# EAGLE board IOT-NodeMCU8266-1_v5 (EAGLE 9.7.0)
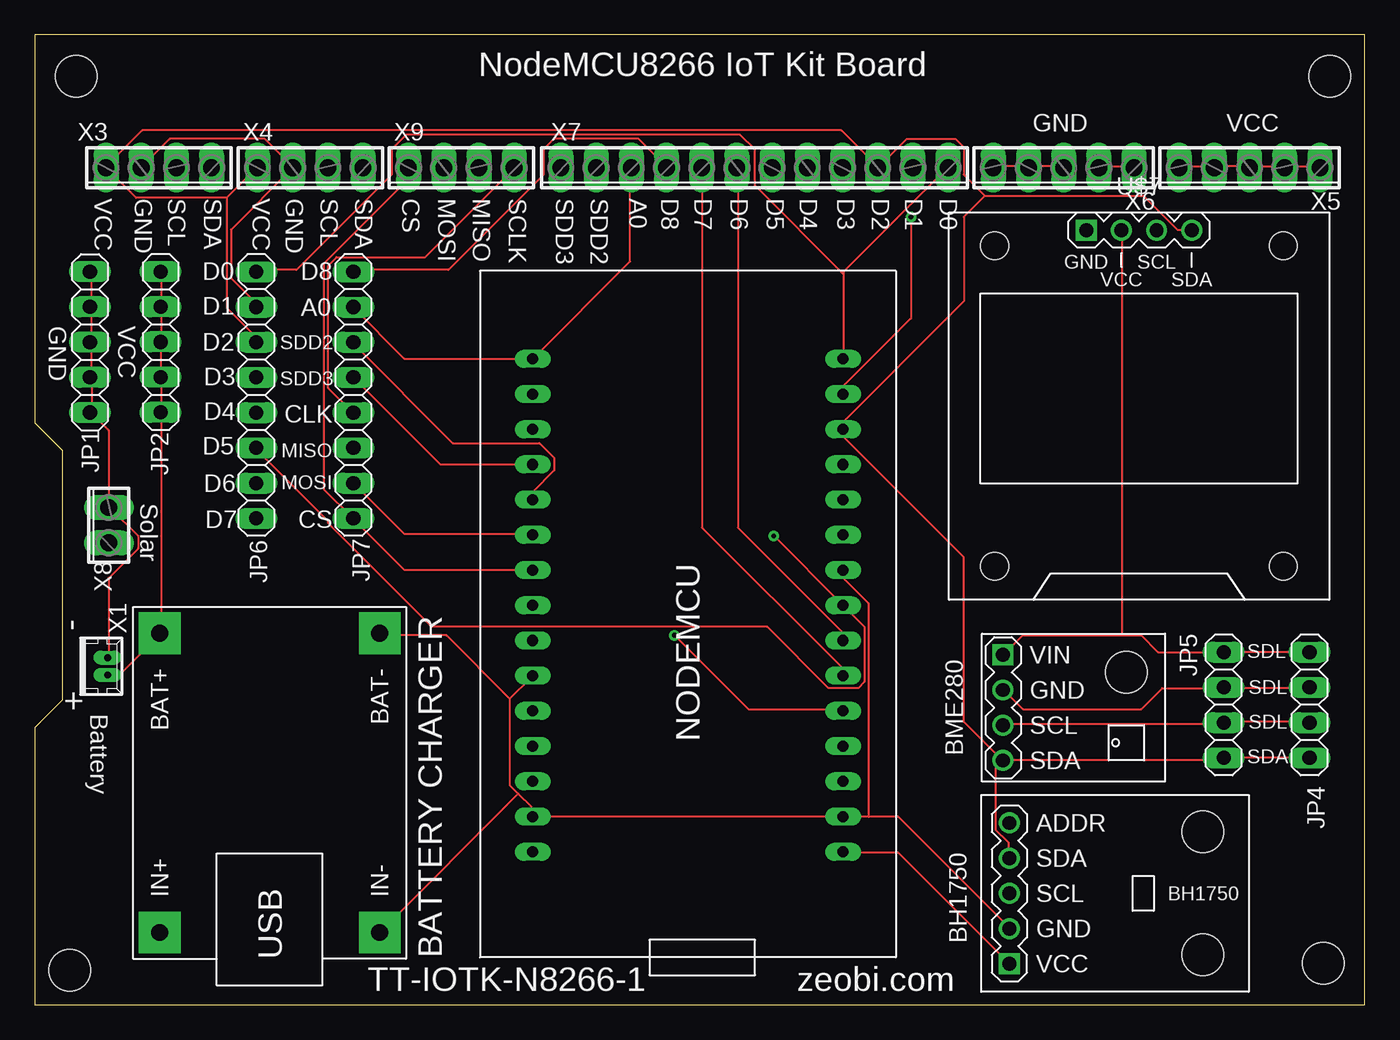
[diagram p0: board, top side]
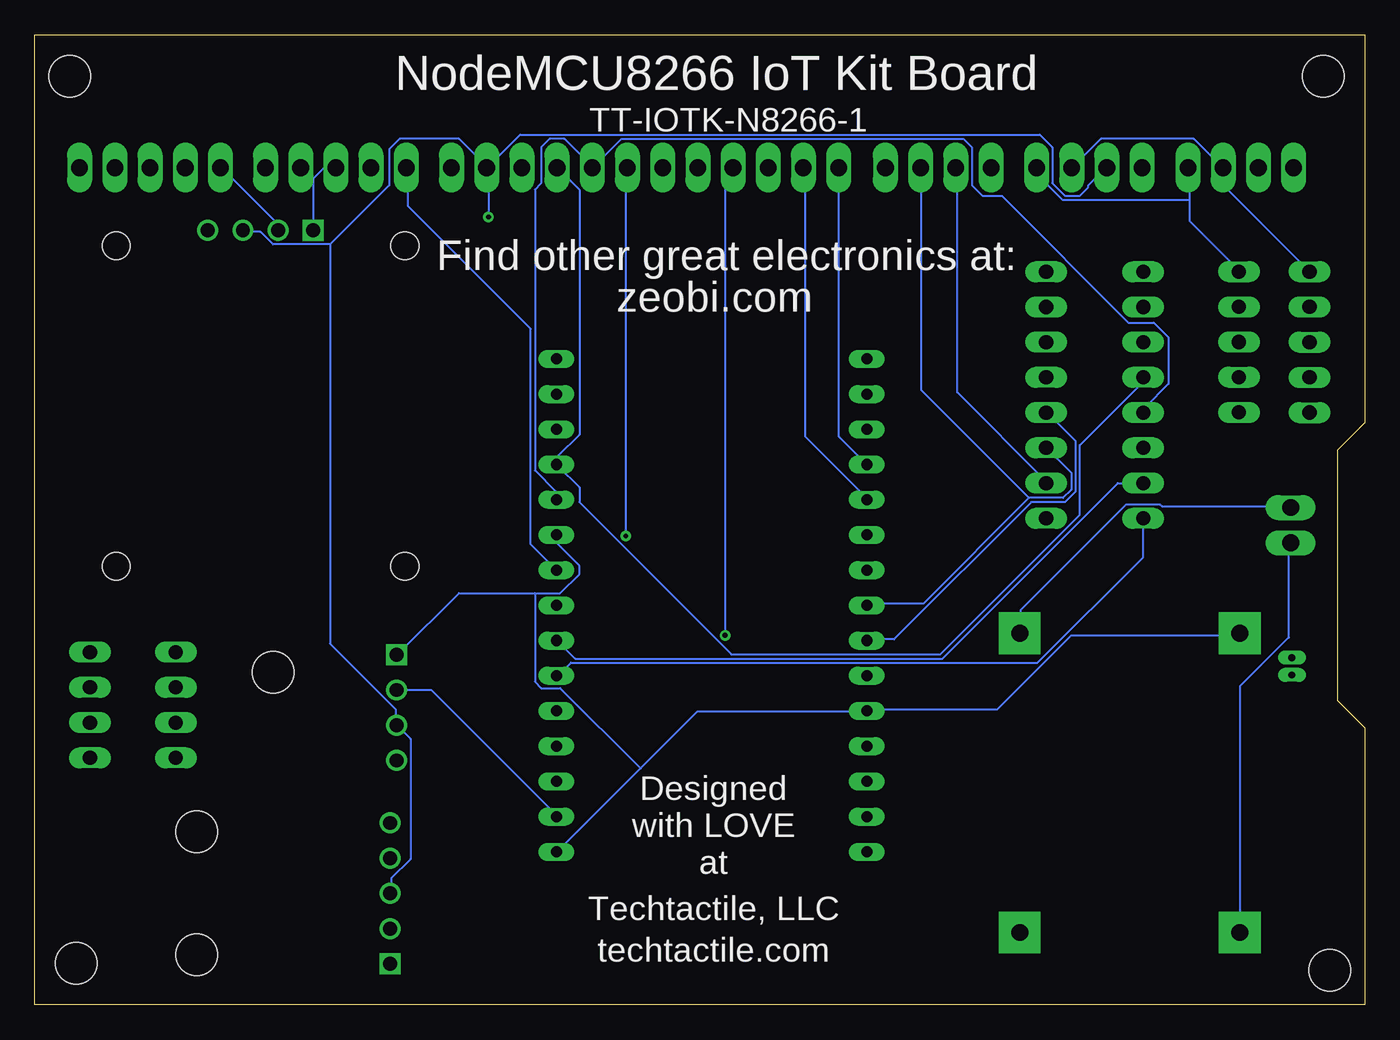
[diagram p1: board, bottom side, seen from below]

Size 96 x 70 mm. Coordinates in mm from the lower left corner, seen from the top.
Outline: 0,0 96,0 96,70 0,70 0,42 2,40 2,22 0,20 0,0
Copper layers (1*16): Top 0.035mm / dielectric 1.5mm / Bottom 0.035mm
Design rules "default": minimum track width 6mil, minimum drill 0.35mm, track to track 6mil, track to pad 6mil, pad to pad 6mil, via to via 6mil, smd to smd 6mil, copper to edge 40mil, drill to drill 6mil, minimum pad ring 10mil, minimum via ring 8mil, stop-mask expansion 4mil, vias tented up to drill 0mil, thermal gap 10mil
Holes 3 mm at 3,67 93.48,67 93,3 2.52,2.52

## Footprints (pad centres in the part's own frame; a part is rotated, then mirrored left to right if it is on the bottom)
TEMP-HUM-PRES-BME280 = drill 1 square: 1 -5.08,3.81 | drill 1: 2 -5.08,1.27; 3 -5.08,-1.27; 4 -5.08,-3.81 | hole 3: 3.81,2.54
1X05 = drill 1.016 long: 1 -5.08,0; 2 -2.54,0; 3 0,0; 4 2.54,0; 5 5.08,0
1X04 = drill 1.016 long: 1 -3.81,0; 2 -1.27,0; 3 1.27,0; 4 3.81,0
1X08 = drill 1.016 long: 1 -8.89,0; 2 -6.35,0; 3 -3.81,0; 4 -1.27,0; 5 1.27,0; 6 3.81,0; 7 6.35,0; 8 8.89,0
NODEMCUESP8266 = drill 0.8 long: 1 12.24,15.24; 2 12.24,12.7; 3 12.24,10.16; 4 12.24,7.62; 5 12.24,5.08; 6 12.24,2.54; 7 12.24,0; 8 12.24,-2.54; 9 12.24,-5.08; 10 12.24,-7.62; 11 12.24,-10.16; 12 12.24,-12.7; 13 12.24,-15.24; 14 12.24,-17.78; 15 12.24,-20.32; 16 -10.16,-20.32; 17 -10.16,-17.78; 18 -10.16,-15.24; 19 -10.16,-12.7; 20 -10.16,-10.16; 21 -10.16,-7.62; 22 -10.16,-5.08; 23 -10.16,-2.54; 24 -10.16,0; 25 -10.16,2.54; 26 -10.16,5.08; 27 -10.16,7.62; 28 -10.16,10.16; 29 -10.16,12.7; 30 -10.16,15.24
LIGHT-SENSOR-BH1750 = drill 1 square: 1 -7.62,-5.08 | drill 1: 2 -7.62,-2.54; 3 -7.62,0; 4 -7.62,2.54; 5 -7.62,5.08 | hole 3: 6.35,4.445; 6.35,-4.445
BATTERY-CHARGER-LI-5V = drill 1.2 pad 3 square: BAT+ 10.795,8.255; BAT- 10.795,-7.62; IN+ -10.795,8.255; IN- -10.795,-7.62
DISPLAY-OLED-128X64-I2C = drill 1 square: 1 -3.81,12.7 | drill 1: 2 -1.27,12.7; 3 1.27,12.7; 4 3.81,12.7 | hole 2: -10.414,11.557; 10.414,11.557; 10.414,-11.557; -10.414,-11.557
53047-02 = drill 0.5 pad 0.698 long: 1 0.625,0.45; 2 -0.625,0.45
4POL254 = drill 1.2 long: 1 -3.81,0; 2 -1.27,0; 3 1.27,0; 4 3.81,0
5POL254 = drill 1.2 long: 1 -5.08,0; 2 -2.54,0; 3 0,0; 4 2.54,0; 5 5.08,0
12POL254 = drill 1.2 long: 1 -13.97,0; 2 -11.43,0; 3 -8.89,0; 4 -6.35,0; 5 -3.81,0; 6 -1.27,0; 7 1.27,0; 8 3.81,0; 9 6.35,0; 10 8.89,0; 11 11.43,0; 12 13.97,0
2POL254 = drill 1.2 long: 1 -1.27,0; 2 1.27,0

## Placement (x,y rotation side)
BME280  TEMP-HUM-PRES-BME280  [TEMP-HUM-PRES-BME280]  74.97,21.45 0 top
JP1  GND  [1X05]  3.99,47.82 90 top
JP2  VCC  [1X05]  9.09,47.83 90 top
JP4  I2C  [1X04]  92.01,21.64 270 top
JP5  I2C  [1X04]  85.81,21.64 270 top
JP6  PINHD-1X8  [1X08]  16,44 270 top
JP7  PINHD-1X8  [1X08]  23,44 270 top
U$1  [NODEMCUESP8266]  48.18,26.29 180 top
U$4  LIGHT-SENSOR-BH1750  [LIGHT-SENSOR-BH1750]  77.97,8.05 0 top
U$5  BATTERY-CHARGER-LI-5V  [BATTERY-CHARGER-LI-5V]  17.28,16.02 90 top
U$7  DISPLAY-OLED-128X64-I2C  [DISPLAY-OLED-128X64-I2C]  79.7,43.2 0 top
X1  Battery  [53047-02]  4.81,24.43 270 top
X3  [4POL254]  8.96,60.4 180 top
X4  [4POL254]  19.89,60.4 180 top
X5  [5POL254]  87.67,60.4 180 top
X6  [5POL254]  74.26,60.4 180 top
X7  [12POL254]  51.95,60.4 180 top
X8  [2POL254]  5.35,34.61 90 top
X9  [4POL254]  30.79,60.4 180 top

## Library data of the parts
BME280 U$4 U$5 = diy-modules (2)
JP1 JP2 JP4-JP7 = Connector; CATEGORY: CONNECTOR; SUB-CATEGORY: PIN-HEADER
U$1 = NODEMCU
U$7 = diy-modules
X1 = con-molex; MF: MOLEX; MPN: 53047-0210; OC_FARNELL: 9733051; OC_NEWARK: 57H4701
X3-X9 = con-phoenix-254; OC_FARNELL: unknown; OC_NEWARK: unknown

## Nets
A0: JP7.2 U$1.15 X7.10
CS: JP7.8 U$1.9 X9.4
D0: JP6.1 U$1.16 X7.1
D3: JP6.4 U$1.19 X7.4
D4: JP6.5 U$1.20 X7.5
D5: JP6.6 U$1.23 X7.6
D6: JP6.7 U$1.24 X7.7
D7: JP6.8 U$1.25 X7.8
D8: JP7.1 U$1.26 X7.9
GND: BME280.2 JP1.1 JP1.2 JP1.3 JP1.4 JP1.5 JP4.2 JP5.2 U$1.2 U$1.6 U$1.22 U$1.29 U$4.2 U$5.BAT- U$5.IN- U$7.1 X1.2 X3.2 X4.2 X6.1 X6.2 X6.3 X6.4 X6.5 X8.2
MISO: JP7.6 U$1.8 X9.2
MOSI: JP7.7 U$1.10 X9.3
N$10: U$4.5
RX: U$1.27
SCL: BME280.3 JP4.3 JP5.3 JP6.2 U$1.17 U$4.3 U$7.3 X3.3 X4.3 X7.2
SCLK: JP7.5 U$1.7 X9.1
SDA: BME280.4 JP4.4 JP5.4 JP6.3 U$1.18 U$4.4 U$7.4 X3.4 X4.4 X7.3
SDD2: JP7.3 U$1.11 X7.11
SDD3: JP7.4 U$1.12 X7.12
SOLARIN: U$5.IN+ X8.1
TX: U$1.28
VCC: BME280.1 JP2.1 JP2.2 JP2.3 JP2.4 JP2.5 JP4.1 JP5.1 U$1.5 U$1.21 U$1.30 U$4.1 U$5.BAT+ U$7.2 X1.1 X3.1 X4.1 X5.1 X5.2 X5.3 X5.4 X5.5

## Tracks (layer width: path | path; a pad name or v marks a point on that pad's centre or on a via)
A0
  Top 0.152: JP7.2 23.01,50.29 26.67,46.63 35.81,46.63 U$1.15 35.97,46.63 42.98,53.65 42.98,60.35 X7.10
CS
  Top 0.152: U$1.9 35.81,31.39 26.67,31.39 23.01,35.05 JP7.8 22.86,35.2 20.88,37.19 20.88,53.49 26.98,59.59 26.98,60.35 X9.4
D0
  Top 0.152: 58.37,52.73 58.37,52.88 65.84,60.35 X7.1 | 58.37,52.73 58.37,46.63 U$1.16 | 58.37,52.73 51.97,59.13 51.97,61.72 50.9,62.79 26.82,62.79 25.76,61.72 25.76,59.89 18.9,53.03 16,53.03 JP6.1
D3
  Bottom 0.152: X7.4 58.22,60.35 56.69,58.83 56.69,41.15 58.22,39.62 58.22,39.01 U$1.19 58.22,38.86 56.69,37.34 56.69,36.27 45.72,25.3 30.63,25.3 20.57,35.36 20.57,40.39 16,44.96 JP6.4
D4
  Bottom 0.152: U$1.20 58.37,36.58 58.37,37.03 59.89,38.56 59.89,58.83 59.44,59.28 59.44,61.87 58.83,62.48 57.76,62.48 55.78,60.5 X7.5 55.63,60.5 53.65,62.48 28.96,62.48 28.35,61.87 28.35,59.13 27.58,58.37 26.21,58.37 17.07,49.23 15.24,49.23 14.17,48.16 14.17,44.81 15.85,43.13 15.85,42.82 JP6.5
D5  (via drill 0.35)
  Top 0.152: v53.34,33.83 58.22,28.96 U$1.23 58.37,28.8 59.89,27.28 59.89,23.32 59.44,22.86 57.3,22.86 52.88,27.28 28.65,27.28 21.18,34.75 21.18,34.9 16,40.08 JP6.6
  Bottom 0.152: v53.34,33.83 53.34,60.35 X7.6
D6
  Top 0.152: U$1.24 58.22,26.36 58.22,26.98 50.75,34.44 50.75,60.35 X7.7
  Bottom 0.152: JP6.7 17.83,37.64 30.48,24.99 57,24.99 58.22,26.21 U$1.24
D7
  Top 0.152: U$1.25 58.22,23.77 58.22,24.38 48.16,34.44 48.16,60.35 X7.8
  Bottom 0.152: JP6.8 16,35.05 16,32.31 23.62,24.69 57.3,24.69 58.22,23.77 U$1.25
D8  (via drill 0.35)
  Top 0.152: v46.18,26.67 51.51,21.34 58.22,21.34 U$1.26 | JP7.1 23.01,53.03 29.87,53.03 36.73,59.89 36.73,61.72 37.49,62.48 43.59,62.48 45.57,60.5 X7.9
  Bottom 0.152: v46.18,26.67 46.18,59.89 45.72,60.35 X7.9
GND
  Top 0.152: X1.2 5.33,25.15 5.33,30.79 7.47,32.92 7.47,33.83 5.49,35.81 X8.2 5.33,35.97 5.33,41.45 4.12,42.67 JP1.1 4.12,42.82 4.12,45.26 JP1.2 4.12,45.41 4.12,47.7 JP1.3 4.12,47.85 4.12,50.29 JP1.4 4.12,50.44 4.12,52.88 JP1.5 | 34.9,15.24 34.29,15.85 34.29,22.1 | 34.9,15.24 35.81,14.33 35.81,13.72 U$1.2 35.97,13.56 58.22,13.56 U$1.29 58.37,13.56 60.2,13.56 | 34.29,22.1 35.81,23.62 U$1.6 | 34.9,15.24 24.99,5.33 U$5.IN- | 34.29,22.1 29.72,26.67 24.99,26.67 U$5.BAT- | X6.5 69.19,60.5 71.63,60.5 X6.4 71.78,60.5 74.22,60.5 X6.3 | X6.1 79.25,60.5 76.81,60.5 X6.2 | JP4.2 91.9,22.86 85.95,22.86 JP5.2 85.8,22.86 81.38,22.86 79.86,21.34 71.32,21.34 69.95,22.71 BME280.2 | 60.2,13.56 62.33,13.56 70.26,5.64 U$4.2 | 60.2,13.56 60.2,28.96 58.37,30.79 58.37,31.24 U$1.22
  Bottom 0.152: JP1.5 4.12,53.03 10.21,59.13 10.21,60.35 X3.2 10.36,60.5 12.34,62.48 19.05,62.48 21.03,60.5 X4.2 | 75.89,59.59 75.89,55.93 U$7.1 | 75.89,59.59 76.66,60.35 X6.2 | 75.89,59.59 75.13,60.35 74.37,60.35 X6.3 | BME280.2 69.8,22.71 67.36,22.71 58.37,13.72 U$1.29 | X6.5 69.04,60.35 69.04,57.61 60.2,48.77 60.2,33.22 58.37,31.39 U$1.22 | X8.2 5.49,35.97 14.63,35.97 14.78,36.12 17.22,36.12 24.84,28.5 24.84,26.82 U$5.BAT-
MISO
  Bottom 0.152: 24.23,36.58 31.85,28.96 35.81,28.96 U$1.8 | 24.23,36.58 21.79,36.58 21.18,37.19 21.18,38.41 22.86,40.08 JP7.6 | 24.23,36.58 32,44.35 32,60.35 X9.2
MOSI
  Top 0.152: U$1.10 35.81,33.98 26.67,33.98 23.01,37.64 JP7.7
  Bottom 0.152: X9.3 29.41,60.35 29.41,44.2 23.01,37.8 JP7.7
SCL  (via drill 0.35)
  Top 0.152: JP4.3 91.9,20.42 85.95,20.42 JP5.3 85.8,20.27 69.95,20.27 BME280.3 | JP6.2 15.85,50.44 15.85,50.75 14.17,52.43 14.17,55.93 18.59,60.35 X4.3 18.59,60.5 16.61,62.48 9.75,62.48 7.77,60.5 X3.3 | v63.25,56.84 63.25,49.53 58.37,44.65 58.37,44.2 U$1.17
  Bottom 0.152: U$4.3 70.26,8.08 70.26,9.14 68.89,10.52 68.89,19.2 69.8,20.12 BME280.3 69.95,20.27 69.95,21.34 74.68,26.06 74.68,54.86 | v63.25,56.84 63.25,60.35 X7.2 | 74.68,54.86 78.79,54.86 79.7,55.78 80.92,55.78 U$7.3 | 74.68,54.86 70.41,59.13 70.41,61.72 69.65,62.48 65.38,62.48 63.4,60.5 X7.2 | X4.3 18.75,60.35 19.96,59.13 19.96,58.98 20.57,58.37 21.64,58.37 22.55,59.28 22.55,61.87 23.47,62.79 60.96,62.79 63.25,60.5 X7.2
SCLK
  Top 0.152: X9.1 34.59,60.35 28.19,53.95 21.79,53.95 21.18,53.34 21.18,44.5 22.86,42.82 JP7.5
  Bottom 0.152: U$1.7 35.81,26.36 33.98,26.36 24.08,36.27 21.64,36.27 20.88,37.03 20.88,40.69 22.86,42.67 JP7.5
SDA
  Top 0.152: JP4.4 91.9,17.83 85.95,17.83 JP5.4 85.8,17.68 69.95,17.68 BME280.4 | BME280.4 69.8,17.68 67.06,20.42 67.06,32.31 58.37,41 58.37,41.45 U$1.18 58.37,41.6 58.37,42.06 67.06,50.75 67.06,56.84 68.58,58.37 | U$4.4 70.26,10.67 70.26,11.73 69.34,12.65 69.34,17.07 69.8,17.53 BME280.4 | 13.87,58.22 13.87,50.29 15.85,48.31 15.85,47.85 JP6.3 | 13.87,58.22 16,60.35 X4.4 | 13.87,58.22 7.32,58.22 5.18,60.35 X3.4 5.18,60.5 7.77,63.09 58.22,63.09 60.81,60.5 X7.3 60.96,60.5 62.94,62.48 66.45,62.48 67.06,61.87 67.06,59.89 68.58,58.37 | 68.58,58.37 80.01,58.37 82.45,55.93 83.36,55.93 U$7.4
SDD2
  Top 0.152: U$1.11 35.97,36.58 35.97,37.03 37.49,38.56 37.49,39.47 36.42,40.54 30.18,40.54 23.01,47.7 JP7.3
  Bottom 0.152: X7.11 40.39,60.35 40.39,41 35.97,36.58 U$1.11
SDD3
  Top 0.152: U$1.12 35.81,39.01 29.26,39.01 23.01,45.26 JP7.4
  Bottom 0.152: X7.12 37.95,60.35 37.95,41 35.97,39.01 U$1.12
SOLARIN
  Bottom 0.152: X8.1 5.49,33.22 5.49,26.52 8.99,23.01 8.99,5.33 U$5.IN+
VCC
  Top 0.152: X1.1 5.33,23.93 6.25,23.93 8.99,26.67 U$5.BAT+ 9.14,26.82 9.14,42.67 JP2.1 9.14,42.82 9.14,45.26 JP2.2 9.14,45.41 9.14,47.7 JP2.3 9.14,47.85 9.14,50.29 JP2.4 9.14,50.44 9.14,52.88 JP2.5 | U$1.30 58.37,10.97 62.33,10.97 70.26,3.05 U$4.1 | X5.1 92.66,60.5 90.22,60.5 X5.2 90.07,60.5 87.78,60.5 X5.3 87.63,60.5 85.19,60.5 X5.4 85.04,60.5 82.6,60.5 X5.5 | JP4.1 91.9,25.45 85.95,25.45 JP5.1 81.08,25.45 79.86,26.67 78.49,26.67 | 78.49,26.67 71.32,26.67 69.95,25.3 BME280.1 | 78.49,26.67 78.49,55.78 U$7.2
  Bottom 0.152: 12.65,58.06 12.65,56.54 9.14,53.03 JP2.5 | 12.65,58.06 12.65,60.35 X3.1 | 12.65,58.06 21.79,58.06 23.62,59.89 23.62,60.35 X4.1 | 52.27,17.07 58.22,11.12 U$1.30 | 52.27,17.07 48.16,21.18 35.97,21.18 U$1.5 35.81,21.34 26.52,21.34 21.18,26.67 9.14,26.67 U$5.BAT+ | U$7.2 78.49,55.93 78.49,56.39 82.45,60.35 X5.5 | 59.89,29.72 65.38,29.72 69.8,25.3 BME280.1 | 59.89,29.72 58.06,29.72 56.69,31.09 56.69,31.7 58.22,33.22 58.22,33.83 U$1.21 | 52.27,17.07 58.06,22.86 59.44,22.86 59.89,23.32 59.89,29.72

## Text on the board
tNames: NodeMCU8266 IoT Kit Board | GND | VCC | VCC | GND | SCL | SDA | VCC | GND | SCL | SDA | CS | MOSI | MISO | SCLK | SDD3 | SDD2 | A0 | D8 | D7 | D6 | D5 | D4 | D3 | D2 | D1 | D0 | D0 | D8 | D1 | A0 | GND | VCC | D2 | SDD2 | D3 | SDD3 | D4 | CLK | D5 | MISO | D6 | MOSI | Solar | D7 | CS | - | SDL | + | Battery | SDL | NODEMCU | BME280 | SDL | SDA | BH1750 | BATTERY CHARGER | TT-IOTK-N8266-1 | zeobi.com
bNames: NodeMCU8266 IoT Kit Board | TT-IOTK-N8266-1 | Find other great electronics at: | zeobi.com | Designed / with LOVE / at | Techtactile, LLC | techtactile.com